# EAGLE board SPD_Parte_uno (EAGLE 9.7.0)

Size 126.69 x 111.68 mm. Coordinates in mm from the lower left corner, seen from the top.
Outline: 0,0 126.69,0 126.69,111.68 0,111.68 0,0
Copper layers (1*16): Top 0.035mm / dielectric 1.5mm / Bottom 0.035mm
Design rules "default": minimum track width 6mil, minimum drill 0.35mm, track to track 6mil, track to pad 6mil, pad to pad 6mil, via to via 6mil, smd to smd 6mil, copper to edge 40mil, drill to drill 6mil, minimum pad ring 10mil, minimum via ring 8mil, stop-mask expansion 4mil, vias tented up to drill 0mil, thermal gap 10mil

## Footprints (pad centres in the part's own frame; a part is rotated, then mirrored left to right if it is on the bottom)
7SEG-13 = drill 0.813 long: 1 -5.08,-7.62; 2 -2.54,-7.62; 3 0,-7.62; 4 2.54,-7.62; 5 5.08,-7.62; 6 5.08,7.62; 7 2.54,7.62; 8 0,7.62; 9 -2.54,7.62; 10 -5.08,7.62
RESAD1016W63L850D250B = drill 0.83 pad 1.43: 1 -5.08,0; 2 5.08,0
SWITCH-MOMENTARY-PTH-6.5MM = drill 1.016 pad 1.88: 1 -3.251,2.261; 2 3.251,2.261; 3 -3.251,-2.261; 4 3.251,-2.261
ARDUINO-UNO-R3-SHIELD = drill 1.016 pad 1.88: 3.3V 24.13,-2.54; 5V 24.13,0; A0 24.13,12.7; A1 24.13,15.24; A2 24.13,17.78; A3 24.13,20.32; A4 24.13,22.86; A5 24.13,25.4; AREF -24.13,-13.97; D2 -24.13,20.32; D3 -24.13,17.78; D4 -24.13,15.24; D5 -24.13,12.7; D6 -24.13,10.16; D7 -24.13,7.62; D8 -24.13,3.81; D9 -24.13,1.27; D10 -24.13,-1.27; D11 -24.13,-3.81; D12 -24.13,-6.35; D13 -24.13,-8.89; GND@0 24.13,2.54; GND@1 24.13,5.08; GND@2 -24.13,-11.43; IOREF 24.13,-7.62; NC 24.13,-10.16; RES 24.13,-5.08; RX -24.13,25.4; SCL -24.13,-19.05; SDA -24.13,-16.51; TX -24.13,22.86; VIN 24.13,7.62

## Placement (x,y rotation side)
DIGITVISUAL11  7SEG-CA  [7SEG-13]  98.09,64.53 0 top
DIGITVISUAL21  7SEG-CA  [7SEG-13]  117.42,63.59 0 top
R1  230  [RESAD1016W63L850D250B]  72.62,95.54 0 top
R2  230  [RESAD1016W63L850D250B]  73.64,85.43 0 top
R3  230  [RESAD1016W63L850D250B]  73.04,90.46 0 top
R4  230  [RESAD1016W63L850D250B]  73.84,80.16 0 top
R5  230  [RESAD1016W63L850D250B]  73.6,66.93 0 top
R6  230  [RESAD1016W63L850D250B]  71.43,60.9 0 top
R7  230  [RESAD1016W63L850D250B]  69.35,54.41 0 top
SPUL1  SWITCH_MOMENTARY  [SWITCH-MOMENTARY-PTH-6.5MM]  85.77,35.75 90 top
SPUL2  SWITCH_MOMENTARY  [SWITCH-MOMENTARY-PTH-6.5MM]  85.95,21.27 90 top
SPUL3  SWITCH_MOMENTARY  [SWITCH-MOMENTARY-PTH-6.5MM]  86.19,7.37 90 top
UPLACAARD1  ARDUINO-UNO-R3-SHIELD  [ARDUINO-UNO-R3-SHIELD]  29.84,63.8 180 top

## Library data of the parts
DIGITVISUAL11 DIGITVISUAL21 = Tinkercad; CATEGORY: Opto-Electronic; SUB-CATEGORY: Display; TYPE: 7-Segment
R1-R7 SPUL1-SPUL3 UPLACAARD1 = Tinkercad

## Nets
DIGITVISUAL11_A: DIGITVISUAL11.7 DIGITVISUAL21.7 R3.2
DIGITVISUAL11_B: DIGITVISUAL11.6 DIGITVISUAL21.6 R1.2
DIGITVISUAL11_C: DIGITVISUAL11.4 DIGITVISUAL21.4 R7.2
DIGITVISUAL11_D: DIGITVISUAL11.2 DIGITVISUAL21.2 R6.2
DIGITVISUAL11_E: DIGITVISUAL11.1 DIGITVISUAL21.1 R5.2
DIGITVISUAL11_F: DIGITVISUAL11.9 DIGITVISUAL21.9 R2.2
DIGITVISUAL11_G: DIGITVISUAL11.10 DIGITVISUAL21.10 R4.2
UPLACAARD1_A4: DIGITVISUAL21.3 UPLACAARD1.A4
UPLACAARD1_A5: DIGITVISUAL11.3 UPLACAARD1.A5
UPLACAARD1_D2: SPUL3.2 UPLACAARD1.D2
UPLACAARD1_D3: SPUL2.2 UPLACAARD1.D3
UPLACAARD1_D4: SPUL1.2 UPLACAARD1.D4
UPLACAARD1_D5: R7.1 UPLACAARD1.D5
UPLACAARD1_D6: R6.1 UPLACAARD1.D6
UPLACAARD1_D7: R5.1 UPLACAARD1.D7
UPLACAARD1_D8: R4.1 UPLACAARD1.D8
UPLACAARD1_D9: R2.1 UPLACAARD1.D9
UPLACAARD1_D10: R3.1 UPLACAARD1.D10
UPLACAARD1_D11: R1.1 UPLACAARD1.D11
UPLACAARD1_GND: SPUL1.3 SPUL2.3 SPUL3.3 UPLACAARD1.GND@0 UPLACAARD1.GND@1 UPLACAARD1.GND@2

## Tracks (layer width: path | path; a pad name or v marks a point on that pad's centre or on a via)
DIGITVISUAL11_A  (2 unrouted)
DIGITVISUAL11_B  (2 unrouted)
DIGITVISUAL11_C  (2 unrouted)
DIGITVISUAL11_D  (2 unrouted)
DIGITVISUAL11_E  (2 unrouted)
DIGITVISUAL11_F  (2 unrouted)
DIGITVISUAL11_G  (2 unrouted)
UPLACAARD1_A4  (1 unrouted)
UPLACAARD1_A5  (1 unrouted)
UPLACAARD1_D2  (1 unrouted)
UPLACAARD1_D3  (1 unrouted)
UPLACAARD1_D4  (1 unrouted)
UPLACAARD1_D5  (1 unrouted)
UPLACAARD1_D6  (1 unrouted)
UPLACAARD1_D7  (1 unrouted)
UPLACAARD1_D8  (1 unrouted)
UPLACAARD1_D9  (1 unrouted)
UPLACAARD1_D10  (1 unrouted)
UPLACAARD1_D11  (1 unrouted)
UPLACAARD1_GND  (5 unrouted)